# Altium PCB ATRACK_WIFI_V1.PcbDoc
Units mm, origin at the board's own origin, x right, y up, seen from the top; angles counter-clockwise.
Board outline 45 x 67 mm, 2 copper layers (Top Layer, Bottom Layer); 89 components, 58 nets, 258 pads, 71 vias.
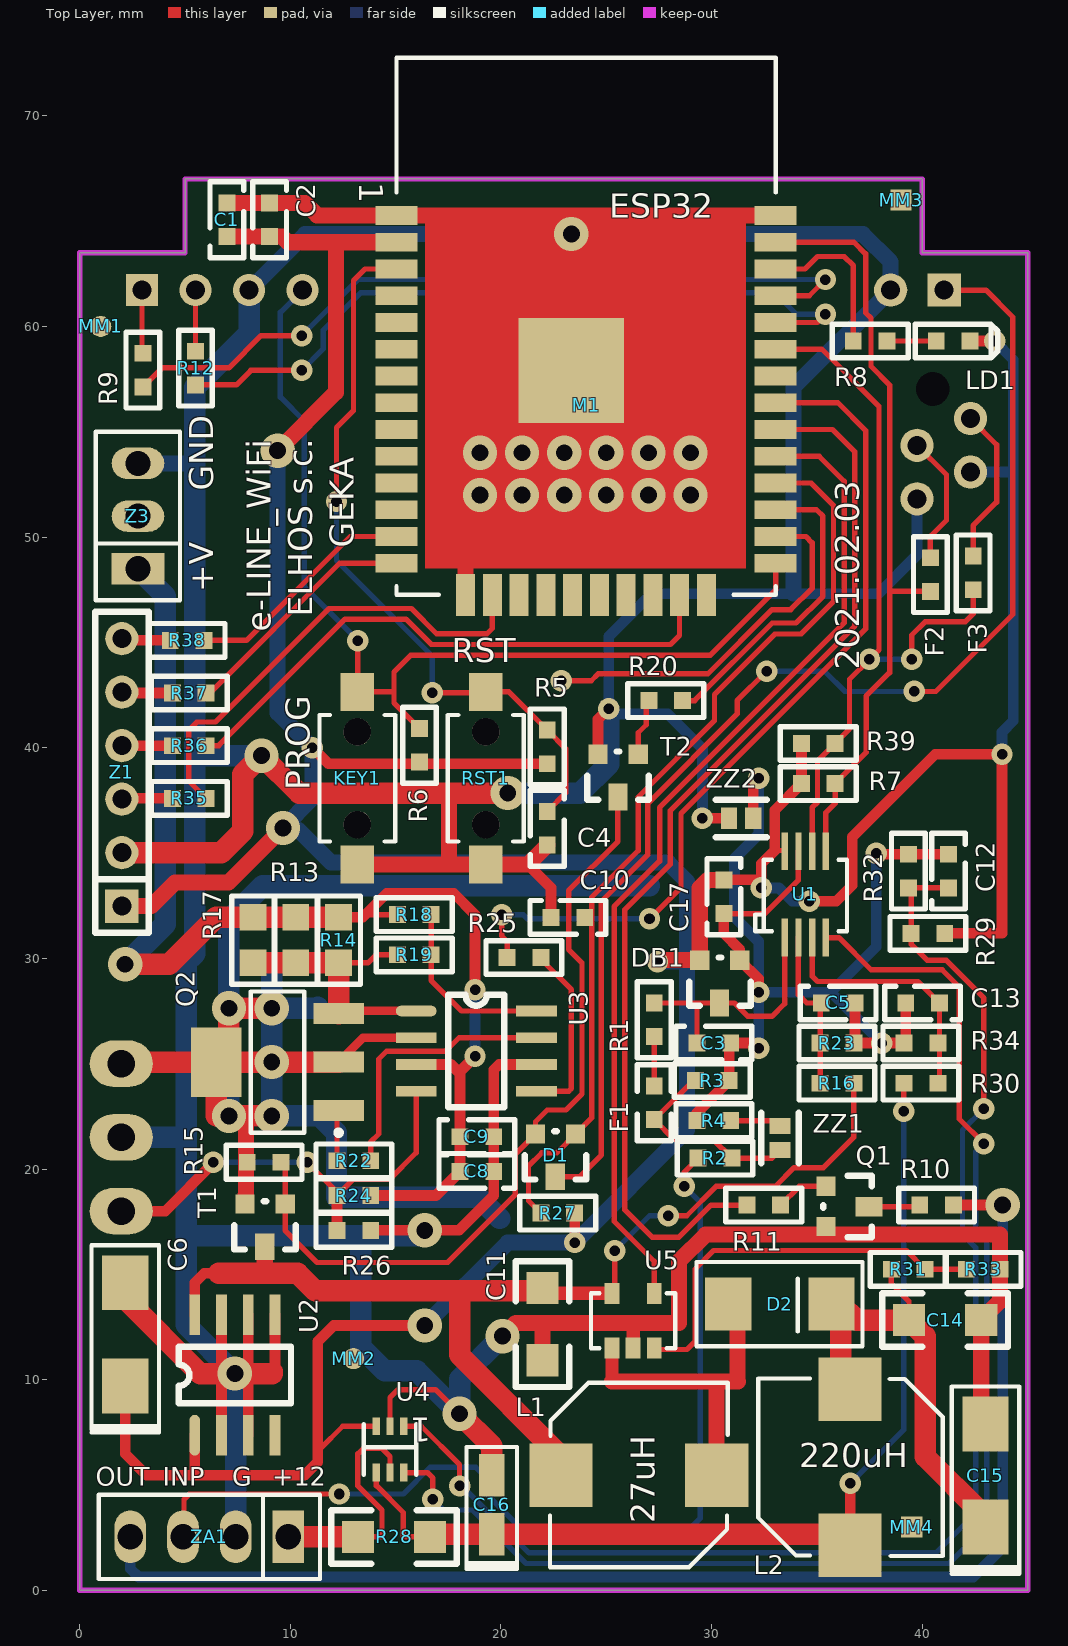
[diagram p0: Top Layer view]
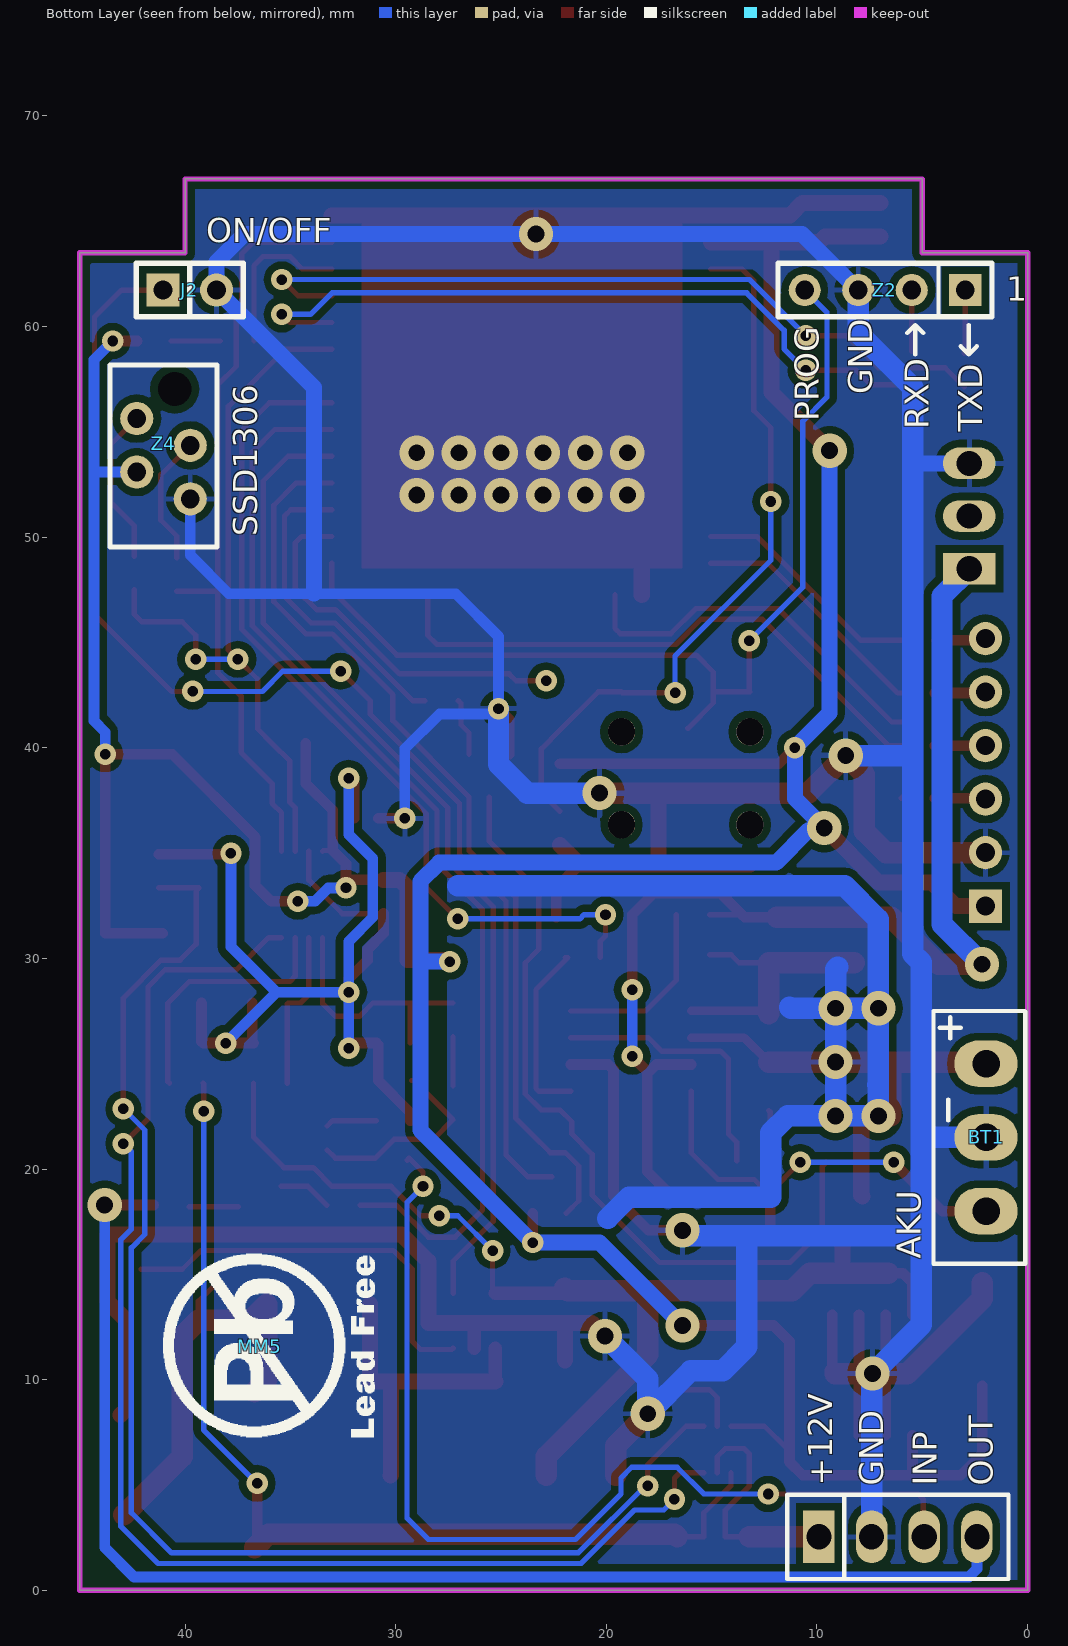
[diagram p1: Bottom Layer view, seen from below]

## Layer stack, top to bottom
Top Layer: signal copper 0.0356
Dielectric: dielectric 0.32, FR-4, Dk 4.8
Bottom Layer: signal copper 0.0356

## Board outline
0,0 0,63.5 5,63.5 5,67 40,67 40,63.5 45,63.5 45,0

## Design rules (kind name [scope] priority, off if disabled: settings)
Clearance Clear_Poly [InPolygon vs not InPolygon] p1: gap=0.356
Clearance Clear_RAD [InNamedPolygon('RAD') vs not InNamedPolygon('RAD')] p2: gap=0.406
Clearance [All] p3: gap=0.203
ComponentClearance [All] p1 off: gap=0.254 collisioncheckmode=3 verticalgap=0.254 showdistances=FALSE
HoleSize [All] p1: absolutevalues=TRUE maxlimit=5 minlimit=0.3 maxpercent=80.000 minpercent=20.000
MinimumSolderMaskSliver [All] p1: minsoldermaskwidth=0.102
PolygonConnect [All] p1: connectstyle=Relief reliefconductorwidth=0.254 reliefentries=4 polygonreliefangle="90 Angle"
RoutingVias [All] p1: holewidth=0.5 width=1.016 viastyle="Through Hole" minholewidth=0.3 minwidth=0.635 maxholewidth=3 maxwidth=5.08
SilkToSilkClearance [All] p1: silktosilkclearance=0.102
SilkscreenOverComponentPads [All] p1: minsilkscreentomaskgap=0.102
SolderMaskExpansion [All] p1: expansion=0.102
Width [All] p1: maxlimit=5.08 minlimit=0.203 preferedwidth=0.254 minimp=50.000000 maximp=50.000000 favimp=50.000000
23 further rules are at their usual default settings.

## Components (designator, comment, footprint, x,y, rotation, side; value= is the part's Value field where it differs from the comment)
BT1 "Battery" BAT4 1.972,18 r270 bottom
C1 "100n" 0603C 6.985,65.962 r90 top
C2 "100n" 0603C 9.017,65.962 r90 top
C3 "100n" 0603C 29.209,25.979 r180 top
C4 "100n" 0603C 22.197,37.077 r90 top
C5 "100n" 0603C 35.102,27.884 r180 top
C6 "100u/6.3V/C" CAP_C 2.159,14.605 r270 top
C8 "1uF" 0603C 17.957,19.883 r180 top
C9 "100n" 0603C 17.957,21.534 r180 top
C10 "100n" 0603C 24.075,31.948 r0 top
C11 "4.7uF" 1206 21.976,14.354 r90 top
C12 "100n" 0603C 41.247,33.245 r270 top
C13 "100n" 0603C 40.915,27.884 r0 top
C14 "4.7uF" 1206 39.367,12.832 r180 top
C15 "100u/16V/C" CAP_C 43,7.9 r270 top
C16 "10u/16V/A" CAP_A 19.558,5.461 r270 top
C17 "100n" 0603C 30.579,33.826 r90 top
D1 "BAT54C" SOT23 22.553,19.451 r270 top
D2 "SK13" RD5 31.187,13.589 r0 top
DB1 "BAS70-04" SOT-23 31.341,29.916 r0 top
F1 "" 0603L 27.277,24.047 r90 top
F2 "BLM18BB141SN1D" 0603R 40.386,49.122 r90 top
F3 "BLM18BB141SN1D" 0603R 42.418,49.198 r90 top
J2 "CON2" SIP2 41.04,61.725 r180 bottom
KEY1 "SW-PB" DTSM31N_2 13.18,38.552 r0 top
L1 "DER0705-27uH" DER0705 26.543,5.461 r0 top
L2 "DER0705-220uH" DER0705 36.576,5.842 r270 top
LD1 "green" 0603D 40.563,59.305 r180 top
M1 "ESP32-WROM32" ESP32-WROM32 15.04,47.258 r0 top locked
MM1 "" REF_CIR 1,60 r0 top
MM2 "" REF_CIR 13,11 r0 top
MM3 "" REF_SQR 39,66 r0 top
MM4 "" REF_SQR 39.5,3 r0 top
MM5 "" PB_FREE_GRAF 36.449,11.557 r90 bottom
Q1 "2N7002" SOT23 37.643,18.186 r0 top
Q2 "FZT788B" MP04A_N1 12.291,22.776 r90 top
R1 "100R" 0603R 27.277,26.184 r270 top
R2 "0R" 0603R 29.26,20.518 r180 top
R3 "270R" 0603R 30.933,24.201 r0 top
R4 "270R" 0603R 31.009,22.296 r0 top
R5 "10k" 0603R 22.197,40.938 r90 top
R6 "10k" 0603R 16.129,41.021 r90 top
R7 "10k" 0603R 35.962,38.298 r0 top
R8 "10k" 0603R 36.626,59.305 r180 top
R9 "33R" 0603R 3,58.825 r90 top
R10 "33R" 0603R 39.778,18.288 r180 top
R11 "1k5" 0603R 31.574,18.288 r180 top
R12 "33R" 0603R 5.5,58.925 r90 top
R13 "1R" 0805R 10.259,31.948 r270 top
R14 "1R" 0805R 12.291,31.948 r270 top
R15 "10k" 0603R 9.652,20.32 r0 top
R16 "4k7" 0603R 35.051,24.074 r180 top
R17 "100M" 0805R 8.227,31.948 r270 top
R18 "0R" 0603R 14.985,32.075 r180 top
R19 "100M" 0603R 14.985,30.17 r180 top
R20 "1k" 0603R 26.923,42.235 r180 top
R22 "1k" 0603R 12.115,20.391 r180 top
R23 "4k7" 0603R 36.851,25.979 r0 top
R24 "10k" 0603R 13.915,18.74 r0 top
R25 "100R" 0603R 21.992,30.043 r0 top
R26 "100M" 0603R 12.115,17.089 r180 top
R27 "1k" 0603R 21.795,17.907 r180 top
R28 "5mR" 1206R 13.208,2.54 r180 top
R29 "10k" 0603R 39.369,31.186 r180 top
R30 "10k" 0603R 40.839,24.074 r0 top
R31 "20k" 0603R 38.432,15.24 r180 top
R32 "2k2" 0603R 39.342,35.045 r90 top
R33 "2k2" 0603R 41.988,15.24 r180 top
R34 "2k2" 0603R 39.039,25.979 r180 top
R35 "100R" 0603R 6.1,37.597 r0 top
R36 "100R" 0603R 6.1,40.097 r0 top
R37 "100R" 0603R 6.1,42.597 r0 top
R38 "100R" 0603R 6,45.097 r0 top
R39 "10k" 0603R 35.962,40.203 r0 top
RST1 "SW-PB" DTSM31N_2 19.276,38.552 r0 top
T1 "IRLML6401" SOT23 8.763,16.129 r270 top
T2 "BC847A" SOT23 25.524,37.485 r270 top
U1 "MAX11612" uMAX8 33.47,30.984 r0 top
U2 "LE33CD" SO8 5.461,7.366 r90 top
U3 "BQ2057" SO8 15.974,27.503 r0 top
U4 "INA199A3" SC70-6 15.382,7.788 r180 top
U5 "LM2703" SOT23-5 25.273,11.497 r0 top
Z1 "JTAG" PIN6 2,32.477 r90 top
Z2 "" PIN4 2.96,61.725 r0 bottom
Z3 "Header 3" PIN3_2.5 2.766,48.498 r90 top
Z4 "WYSW" UMATCH-4 39.751,49.276 r90 bottom locked
ZA1 "ZL-4" PIN4_2.5 9.906,2.54 r180 top
ZZ1 "" ZW1 33.246,22.042 r270 top
ZZ2 "" ZW1 31.976,36.647 r180 top

## Footprints (in the part's own frame and the unit in brackets; to place one, negate y for a bottom-side part, rotate by r counter-clockwise, add the part's x,y. Pads: shape width x height; smd on the part's side, far side on the other; paste and mask are expansions set on the pad)
0603C [mm]
  rect 0.8x0.8 smd: 1(-0.1,0) 2(-1.7,0)
  silkscreen extent -2.7,-0.8 0.9,0.8
0603D [mm]
  rect 0.8x0.8 smd: A(-1.7,0) K(-0.1,0)
  silkscreen extent -3.03,-0.8 0.9,0.8
0603L [mm]
  rect 0.8x0.8 smd: 1(-0.1,0) 2(-1.7,0)
  silkscreen extent -2.7,-0.8 0.9,0.8
0603R [mm]
  rect 0.8x0.8 smd: 1(-0.1,0) 2(-1.7,0)
  silkscreen extent -2.7,-0.8 0.9,0.8
0805R [mil]
  rect 50x50 smd: 1(0,0) 2(85,0)
  silkscreen extent -40,-40 125,41
1206 [mil]
  rect 60x60 smd: 1(-0.13,0.21) 2(-135.13,0.21)
  silkscreen extent -185,-50 50,50
1206R [mil]
  rect 60x60 smd: 1(0,0) 2(-135,0)
  silkscreen extent -185,-50 50,50
BAT4 [mm]
  oval 2.2x3 hole 1.3: 1(0,0) 2(-3.5,0) 3(-7,0)
  silkscreen extent -9.5,-2.5 2.5,1.86
CAP_A [mm]
  rect 2x1.2 smd: 1(0,0) 2(2.8,0)
  silkscreen extent -1.34,-1.2 4.45,1.2
CAP_C [mm]
  rect 2.6x2.2 smd: 1(0,0) 2(4.9,0)
  silkscreen extent -1.78,-1.6 7.11,1.6
DER0705 [mm]
  rect 3x3 smd: 1(-3.7,0) 2(3.7,0)
  silkscreen extent -4.22,-4.37 4.22,4.39
DTSM31N_2 [mm]
  round 1.3 hole 1.3 mask+0: 0(0,-2.2) 0(0,2.2)
  rect 1.6x1.8 smd: 1(0,4.1) 2(0,-4.1)
  silkscreen extent -1.8,-3 1.8,3
ESP32-WROM32 [mm]
  rect 2x0.9 smd: 1(0,18.009) 2(0,16.739) 3(0,15.469) 4(0,14.199) 5(0,12.929) 6(0,11.659) 7(0,10.389) 8(0,9.119) 9(0,7.849) 10(0,6.579) 11(0,5.309) 12(0,4.039) 13(0,2.769) 14(0,1.499) 25(18,1.499) 26(18,2.769) 27(18,4.039) 28(18,5.309) 29(18,6.579) 30(18,7.849) 31(18,9.119) 32(18,10.389) 33(18,11.659) 34(18,12.929) 35(18,14.199) 36(18,15.469) 37(18,16.739) 38(18,18.009)
  rect 0.9x2 smd: 15(3.277,0) 16(4.547,0) 17(5.817,0) 18(7.087,0) 19(8.357,0) 20(9.627,0) 21(10.897,0) 22(12.167,0) 23(13.437,0) 24(14.707,0)
  rect 5x5 smd: 39(8.3,10.65)
  silkscreen extent 0,0 18,25.5
MP04A_N1 [mm]
  rect 1x2.4 smd: 1(0,0) 2(2.3,0) 3(4.6,0)
  rect 3.3x2.4 smd: 4(2.3,5.8)
  silkscreen extent -1.17,-0.12 5.65,4.17
PB_FREE_GRAF [mm]
  silkscreen extent -4.29,-5.46 4.43,4.59
PIN3_2.5 [mm]
  rect 1.5x2.5 hole 1.2: 1(0,0)
  oval 1.5x2.5 hole 1.2: 2(2.5,0) 3(5,0)
  silkscreen extent -1.5,-2 6.5,2
PIN4 [mil]
  rect 60x60 hole 35.43: 1(0,0)
  round 60 hole 35.43: 2(100,0) 3(200,0) 4(300,0)
  silkscreen extent -50,-50 350,50
PIN4_2.5 [mm]
  rect 1.5x2.5 hole 1.2: 1(0,0)
  oval 1.5x2.5 hole 1.2: 2(2.5,0) 3(5,0) 4(7.5,0)
  silkscreen extent -1.5,-2 9,2
PIN6 [mil]
  rect 62x62 hole 35.43: 1(0,0)
  round 62 hole 35.43: 2(100,0) 3(200,0) 4(300,0) 5(400,0) 6(500,0)
  silkscreen extent -50,-50 550,50
RD5 [mm]
  rect 2.2x2.5 smd: A(-0.4,0) K(4.5,0)
  silkscreen extent -1.91,-2 5.97,2
REF_CIR [mm]
  round 1 smd paste-0.5 mask+0.5: 0(0,0)
REF_SQR [mm]
  rect 1x1 smd paste-0.5 mask+0.5: ""(0,0)
SC70-6 [mm]
  rect 0.35x0.85 smd mask+0.152: 1(0,0) 2(0.65,0) 3(1.3,0) 4(1.3,2.2) 5(0.65,2.2) 6(0,2.2)
  silkscreen extent -0.6,-0.1 1.9,2.3
SIP2 [mil]
  rect 62x62 hole 35.43: 1(0,0)
  round 62 hole 35.43: 2(100,0)
  silkscreen extent -50,-50 150,50
SO8 [mil]
  oval 76x20 smd: 1(0,0)
  rect 76x20 smd: 2(0,-50) 3(0,-100) 4(0,-150) 5(225,-150) 6(225,-100) 7(225,-50) 8(225,0)
  silkscreen extent 60,-180 165,30
SOT23 [mil]
  rect 36x36 smd: 1(-87,39) 2(-87,-36)
  rect 50x36 smd: 3(-7,1)
  silkscreen extent -92,-56 -2,59
SOT23-5 [mm]
  rect 0.7x1 smd mask+0.152: 1(0,0) 2(1,0) 3(2,0)
  rect 0.7x1 smd: 4(2,2.6) 5(0,2.6)
  silkscreen extent -1,0 3,2.6
SOT-23 [mil]
  rect 36x36 smd: 1(0,0) 2(-75,0)
  rect 36x50 smd: 3(-38,-80)
  silkscreen extent -95,-85 20,5
UMATCH-4 [mil]
  round 50 hole 62.99: 0(305.12,29.13)
  round 62 hole 35.43: 1(100,0) 2(150,100) 3(200,0) 4(250,100)
  silkscreen extent 10,-50 350,150
uMAX8 [mm]
  rect 0.3x1.8 smd: 1(0,0) 2(0.65,0) 3(1.3,0) 4(1.95,0) 5(1.95,4.1) 6(1.3,4.1) 7(0.65,4.1) 8(0,4.1)
  silkscreen extent -1.4,0.3 2.95,3.7
ZW1 [mil]
  rect 30x40 smd: 1(0,0) 2(45,0)
  silkscreen extent -25,-35 70,35

## Part data
BT1: library part BAT_TEL, "Multicell Battery"
C1 C2 C4 C5 C8 C9 C11 C12 C13 C14 C17: library part CAP
C3 C10: library part CAP, "Capacitor"
C6 C15 C16: library part CAP_TANTAL_SMD, "KONDENSATOR ELEKTROLITYCZNY TANTALOWY SMD"
D2: library part "DIODE SCHOTTKY", "Schottky Diode"
F1 F2 F3: library part KORALIK, "Koralik ferrytowy"
J2: "Connector"
L1 L2: library part CEWKA_1
LD1: library part LED
MM1 MM2 MM3 MM4 MM5: library part MECH
Q1: library part MOSFET-P_1_1
Q2: library part PNP
R1 R2 R3 R4 R5 R6 R7 R8 R9 R10 R11 R12 R13 R14 R15 R16 R17 R18 R19 R20 R22 R23 R24 R25 R26 R27 R29 R30 R31 R32 R33 R34 R35 R36 R37 R38 R39: library part RES3
R28: library part RES1
T1: library part IRLML9303, "Low Charge N-Channel MOSFET"
T2: "NPN Transistor"
U2: library part LE33
U4: library part INA199
Z1: library part Pro1F9.tmp_JTAG_64
Z2 Z4: library part CON4, "Connector"
Z3: "Header, 3-Pin"
ZZ1 ZZ2: library part ZWORA

## Via types
v1: diameter 1.016, hole 0.5, Top Layer to Bottom Layer, tented both sides, 41 vias
v2: diameter 1.626, hole 0.8, Top Layer to Bottom Layer, tented both sides, 17 vias
v3: diameter 1.626, hole 0.8, Top Layer to Bottom Layer, 12 vias
v4: diameter 1.016, hole 0.5, Top Layer to Bottom Layer, 1 vias

## Nets (pads, with @x,y where several pads share a name; then routed paths per layer and width w, separated by ;. In a path a pad name is that pad's centre, name@x,y a point inside that pad or via, vN(x,y) a via of type N, cw(c..) or ccw(c..) an arc to the next point about the centre after c; other vN are vias at no path point)
+12_NAP: C13.1 R30.1 R34.2 U1.3 | length 12.2
  Top Layer w0.254: U1.3 34.77,29.154 35.024,28.9 39.799,28.9 C13.1 40.815,24.15 R30.1
+12_ON: M1.29 U5.4 | length 47.6
  Top Layer w0.254: U5.4 27.273,15.621 25.372,17.522 25.372,32.456 27.531,34.615 27.531,37.155 36.294,45.918 36.294,52.649 35.106,53.837 M1.29
+12_PRAD: U1.4 U4.6 | length 64.5
  Top Layer w0.254: U4.6 16.51,5.588 16.764,5.334 v1(16.764,4.318) ; U1.4 36.04,30.984 37.565,29.459 40.942,29.459 41.755,28.646 41.755,22.38 v1(42.926,21.209)
  Bottom Layer w0.254: v1(16.764,4.318) 17.272,3.81 18.657,3.81 21.197,1.27 41.275,1.27 43.053,3.048 43.053,16.637 42.545,17.145 42.545,20.828 v1(42.926,21.209)
ADC2_IN0: M1.26 | length 17.7
  Top Layer w0.254: v1(22.86,43.18) 24.285,43.18 24.61,43.505 29.817,43.505 32.865,46.553 33.754,46.553 34.77,47.569 34.77,49.728 34.471,50.027 M1.26
AGND: C3.2 C5.2 C12.2 C13.2 C17.2 DB1.1 R3.1 R4.2 R23.1 R32.1 R34.1 U1.7 ZZ2.1 | length 55.6
  Top Layer w0.254: C17.2 32.535,32.126 34.12,33.711 U1.7
  Top Layer w0.508: R4.2 29.309,22.677 R3.1 30.833,25.903 C3.2 31.976,25.979 v1(32.23,25.725) ; C17.2 30.579,31.186 31.341,30.424 DB1.1 32.23,29.027 v1(32.23,28.392) ; ZZ2.1 31.976,38.298 v1(32.23,38.552) ; C5.2 36.802,26.03 R23.1 v1(38.072,25.979) R34.1 39.215,26.055 C13.2 ; v1(37.818,34.996) 37.869,34.945 R32.1 C12.2
  Bottom Layer w0.508: v1(32.23,25.725) v1(32.23,28.392) ; v1(32.23,38.552) 32.23,35.885 31.087,34.742 31.087,31.948 32.23,30.805 v1(32.23,28.392) ; v1(37.818,34.996) 37.818,30.551 35.659,28.392 ; v1(38.072,25.979) 35.659,28.392 ; v1(32.23,28.392) 35.659,28.392
AN1: C3.1 DB1.3 R1.2 U1.1 | length 11.7
  Top Layer w0.254: R1.2 29.309,27.884 ; C3.1 29.309,27.884 ; U1.1 33.47,27.854 32.865,27.249 31.722,27.249 31.087,27.884 DB1.3 29.309,27.884
BAT_MEAS: C5.1 R16.1 R23.2 U1.2 | length 7.7
  Top Layer w0.254: U1.2 34.12,29.423 34.12,28.28 34.516,27.884 35.1,27.884 35.151,27.833 R23.2 R16.1
ENAB: C4.1 M1.3 R5.1 RST1.1 | length 34.9
  Top Layer w0.254: v1(12.192,51.689) 12.192,55.192 13,56 13,62.173 13.554,62.727 M1.3 ; v1(16.736,42.616) 19.24,42.616 RST1.1 20.383,42.652 R5.1 23.086,39.949 23.086,37.866 C4.1
  Bottom Layer w0.254: v1(12.192,51.689) 12.192,48.895 16.736,44.351 v1(16.736,42.616)
GND: BT1.2 C1.1 C2.1 C4.2 C6.1 C8.2 C9.2 C10.2 C11.2 C14.2 C15.1 C16.1 J2.2 KEY1.2 M1.1 M1.15 M1.38 M1.39 Q1.2 R26.2 R33.2 RST1.2 T2.2 U2.2 U2.3 U2.5 U2.6 U2.7 U3.6 U4.2 U5.2 Z1.2 Z2.3 Z3.3 Z4.1 ZA1.2 ZZ2.2 | length 361.5
  Top Layer w0.254: U4.2 14.732,9.144 15.113,9.525 16.891,9.525 v2(18.034,8.382)
  Top Layer w0.508: U2.2 6.731,10.287 U2.7 ; U2.3 8.001,10.287 U2.6 ; 9.271,10.414 U2.5 ; R26.2 v2(16.383,17.089) 18.006,17.089 19.657,18.74 C8.2 C9.2 19.657,24.709 19.911,24.963 U3.6 ; 21.272,34.452 22.375,33.349 C10.2 ; T2.2 24.61,41.346 v1(25.118,41.854) ; v1(29.563,36.647) ZZ2.2
  Top Layer w0.635: U5.2 26.273,12.684 26.289,12.7
  Top Layer w0.762: C1.1 C2.1 10.687,65.862 11.275,65.274 15.033,65.274 M1.1 23.46,65.267 ; 9.144,10.287 9.271,10.414 ; KEY1.2 17.526,34.452 ; 17.653,37.846 17.526,37.719 17.526,34.452 ; M1.15 18.317,49.329 23.34,54.352 M1.39 v2(23.34,64.385) 23.34,65.147 23.46,65.267 ; v2(20.066,12.065) 20.701,12.7 21.971,12.7 ; C11.2 21.971,12.7 ; C4.2 21.272,34.452 RST1.2 17.526,34.452 ; M1.38 23.46,65.267 ; C15.1@43.053,8.329 42.799,8.583 C14.2 43.688,13.716 R33.2 43.688,16.891 29.718,16.891 28.448,15.621 28.448,12.7 26.289,12.7 21.971,12.7
  Top Layer w1.016: Z1.2 6.724,35.017 7.747,36.04 7.747,38.735 v2(8.636,39.624) 10.414,37.846 17.653,37.846 v2(20.32,37.846) ; C6.1 2.159,13.843 5.715,10.287 6.731,10.287 v2(7.366,10.287) 8.001,10.287 9.144,10.287 ; ZA1.2 ZA1.2@7.406,3.008 ; v2(18.034,8.382) 19.558,6.858 C16.1
  Bottom Layer w0.508: v1(29.563,36.647) 29.563,39.949 27.912,41.6 25.372,41.6 v1(25.118,41.854) 25.118,45.283 27.15,47.315 33.881,47.315 37.917,47.315 39.751,49.149 Z4.1
  Bottom Layer w0.762: Z3.3 5.461,53.498 ; Z2.3 10.7,64.385 v2(23.34,64.385) 37.183,64.385 38.5,63.068 J2.2 33.881,57.106 33.881,47.315
  Bottom Layer w1.016: BT1.2 5.018,21.5 5.052,21.534 ; ZA1.2 7.406,10.247 v2(7.366,10.287) 5.052,12.601 5.052,16.835 ; Z2.3 8.04,59.69 5.461,57.111 5.461,53.498 5.461,39.624 ; v2(8.636,39.624) 5.461,39.624 ; v2(16.383,17.089) 16.129,16.835 13.335,16.835 ; v2(20.066,12.065) 18.034,10.033 v2(18.034,8.382) 16.002,10.414 14.478,10.414 13.335,11.557 13.335,16.835 ; v2(20.32,37.846) 23.749,37.846 25.118,39.215 v1(25.118,41.854) ; 5.052,16.835 5.052,21.534 ; 5.052,16.835 13.335,16.835 ; 5.052,21.534 5.052,29.817 5.461,30.226 5.461,39.624
  other v3: 19,52 21,52 23,52 25,52 27,52 29,52 19,54 21,54 23,54 25,54 27,54 29,54
K_POWER: C10.1 D1.1 M1.28 R27.1 | length 44.2
  Top Layer w0.254: R27.1 21.308,18.494 21.308,20.137 21.943,20.772 22.654,20.772 D1.1 24.305,22.423 24.305,32.902 26.515,35.111 26.515,37.663 30.134,41.283 30.134,42.529 33.004,45.398 34.25,45.398 35.786,46.934 35.786,51.506 34.725,52.567 M1.28
LAD_STAT: M1.31 R25.2 | length 41.5
  Top Layer w0.254: v1(20.038,32.075) 20.038,31.059 20.292,30.805 R25.2 ; v1(27.051,31.877) 28.547,33.373 28.547,36.878 37.31,45.641 37.31,55.062 35.995,56.377 M1.31
  Bottom Layer w0.254: v1(20.038,32.075) 21.054,32.075 21.252,31.877 v1(27.051,31.877)
LED1: M1.36 R8.1 | length 7.7
  Top Layer w0.254: M1.36 34.434,62.727 35.024,63.317 36.294,63.317 36.726,62.885 R8.1
NetBT1_1: BT1.1 R24.2 R26.1 U3.4 | length 21.1
  Top Layer w0.254: v1(10.795,20.32) 12.215,18.9 R24.2 12.977,19.502 14.704,19.502 15.974,20.772 U3.4
  Top Layer w0.508: BT1.1 4.058,18 6.35,20.292 v1(6.35,20.32) ; R26.1 R24.2
  Bottom Layer w0.254: v1(6.35,20.32) v1(10.795,20.32)
NetBT1_3: BT1.3 Q2.2 Q2.4 R15.2 T1.2 U3.2 | length 86.2
  Top Layer w0.406: Q2.2 13.448,26.233 U3.2
  Top Layer w0.762: T1.2@7.846,18.689 7.897,18.74 7.897,22.446
  Top Layer w1.016: BT1.3 2.048,25.076 Q2.4 ; 7.897,22.446 v2@7.821,22.522 ; v2(9.116,22.522) v2@7.821,22.522 ; v2(9.116,27.63) v2(7.084,27.63) 7.084,25.104 Q2.4@7.112,25.076 ; Q2.2 v2(9.116,25.076) Q2.4@7.112,25.076 ; Q2.4 6.491,22.522 v2(7.084,22.522) v2@7.821,22.522 ; Q2.4 Q2.4@7.112,25.076
  Bottom Layer w1.016: 7.112,24.003 7.084,24.031 ; 9.017,29.591 9.116,29.492 v2(9.116,27.63) ; 11.303,27.686 11.247,27.63 v2(9.116,27.63) ; 19.939,17.653 18.923,18.669 12.192,18.669 12.192,21.717 11.387,22.522 v2(9.116,22.522) ; 27.051,33.452 8.687,33.452 7.084,31.849 v2(7.084,27.63) ; 7.084,24.031 v2(7.084,27.63) ; 7.084,24.031 v2(7.084,22.522) v2(9.116,22.522) ; v2(7.084,27.63) v2(9.116,27.63) ; v2(9.116,22.522) v2(9.116,25.076) v2(9.116,27.63)
NetC14_1: C14.1 C15.2 D2.K L2.1 R31.1 | length 21.6
  Top Layer w0.254: R31.1 38.532,14.554 39.37,13.716 C14.1 ; C15.2@42.799,3.482 C15.2@42.899,3.583
  Top Layer w1.016: L2.1@36.703,9.415 L2.1 36.123,9.995 36.123,13.589 36.885,12.827 C14.1 40.132,12.065 40.132,6.35 C15.2@42.899,3.583
NetC16_2: C16.2 L2.2 R28.2 R30.2 U4.4 | length 48.2
  Top Layer w0.254: U4.4 14.082,4.968 15.367,3.683 15.367,2.54 R28.2 ; v1(39.116,22.733) 39.116,24.051 R30.2
  Top Layer w0.508: L2.2 v1(36.576,5.08)
  Top Layer w1.016: R28.2 16.758,2.661 C16.2 36.057,2.661 L2.2 L2.2@36.703,2.015
  Bottom Layer w0.254: v1(36.576,5.08) 39.116,7.62 v1(39.116,22.733)
NetD1_2: D1.2 R15.1 T1.1 T2.3 | length 38.2
  Top Layer w0.254: R15.1 9.754,20.118 T1.1 9.754,17.086 11.275,15.565 17.47,15.565 20.673,18.768 20.673,20.696 D1.2 21.638,22.245 22.197,22.804 23.086,22.804 23.848,23.566 23.848,29.789 23.213,30.424 23.213,33.218 25.55,35.555 T2.3
NetD1_3: D1.3 J2.1 | length 60.3
  Top Layer w0.254: D1.3 23.721,19.629 24.762,20.67 24.762,32.712 26.972,34.922 26.972,37.358 31.214,41.6 31.214,42.235 v1(32.611,43.632) ; v1(39.624,42.672) 40.64,42.672 44.295,46.327 44.295,60.448 43.018,61.725 J2.1
  Bottom Layer w0.254: v1(32.611,43.632) 35.362,43.632 36.322,42.672 v1(39.624,42.672)
NetD2_A: D2.A L1.2 U5.1 | length 15.7
  Top Layer w0.635: 25.273,9.906 U5.1
  Top Layer w0.762: 25.273,9.906 30.226,9.906 ; L1.2 30.226,5.478 30.226,9.906 ; D2.A@31.223,13.589 31.223,9.925 31.242,9.906 30.226,9.906
NetF1_1: F1.1 R1.1 | length 2.3
  Top Layer w0.254: F1.1 R1.1
NetF1_2: F1.2 R2.2 R3.2 ZZ1.2 | length 9.6
  Top Layer w0.254: R3.2 29.131,24.201 F1.2 28.217,21.407 30.071,21.407 R2.2 32.865,20.518 ZZ1.2
NetF2_1: F2.1 Z4.3 | length 6.2
  Top Layer w0.254: Z4.3 41.148,52.959 41.148,50.8 40.386,50.038 F2.1
NetF3_1: F3.1 Z4.4 | length 7.5
  Top Layer w0.254: Z4.4 43.533,54.384 43.533,51.661 42.418,50.546 F3.1
NetLD1_K: LD1.K R8.2 | length 2.3
  Top Layer w0.254: R8.2 LD1.K
NetQ1_1: Q1.1 R11.2 | length 2.5
  Top Layer w0.254: R11.2 34.163,19.177 Q1.1
NetQ1_3: Q1.3 R10.1 | length 2.3
  Top Layer w0.254: Q1.3 R10.1@39.802,18.212
NetQ2_1: Q2.1 R22.1 | length 2.4
  Top Layer w0.254: R22.1 12.215,22.7 Q2.1
NetR4_1: R4.1 ZZ1.1 | length 2.4
  Top Layer w0.254: R4.1 32.992,22.296 ZZ1.1
NetR9_1: R9.1 Z2.1 | length 3
  Top Layer w0.254: Z2.1 2.96,58.765 R9.1
NetR12_1: R12.1 Z2.2 | length 2.9
  Top Layer w0.254: R12.1 Z2.2
NetR18_2: R18.2 R19.2 U3.8 | length 8.7
  Top Layer w0.254: R18.2 R19.2 16.685,28.951 18.133,27.503 U3.8
NetR20_1: R20.1 T2.1 | length 2.8
  Top Layer w0.254: T2.1 26.515,40.711 26.896,41.092 26.896,42.108 R20.1
NetR22_2: R22.2 U3.7 | length 12.9
  Top Layer w0.254: R22.2 13.815,21.28 14.196,21.661 14.196,25.217 14.577,25.598 17.371,25.598 18.006,26.233 U3.7
NetR25_1: R25.1 U3.5 | length 8.7
  Top Layer w0.254: U3.5 23.213,23.693 23.34,23.82 23.34,28.519 21.816,30.043 R25.1 R25.1@21.943,30.043
NetR31_2: R31.2 R33.1 U5.3 | length 19.2
  Top Layer w0.254: U5.3 27.34,11.43 28.829,11.43 29.21,11.811 29.21,15.24 30.099,16.129 39.243,16.129 R31.2 R33.1
NetR35_2: R35.2 Z1.3 | length 2.4
  Top Layer w0.508: Z1.3 2.04,37.597 R35.2
NetR36_2: R36.2 Z1.4 | length 2.4
  Top Layer w0.508: Z1.4 R36.2
NetR37_2: R37.2 Z1.5 | length 2.4
  Top Layer w0.508: Z1.5 2.04,42.597 R37.2
NetR38_2: R38.2 Z1.6 | length 2.3
  Top Layer w0.508: Z1.6 2.08,45.097 R38.2
OUT1: R10.2 ZA1.4 | length 62.3
  Top Layer w0.508: R10.2 v2(43.815,18.288)
  Bottom Layer w0.508: ZA1.4 2.406,1.023 2.794,0.635 42.418,0.635 43.815,2.032 v2(43.815,18.288)
POWER: M1.27 R20.2 | length 14.9
  Top Layer w0.254: R20.2 29.194,42.235 32.877,45.918 34.008,45.918 35.278,47.188 35.278,50.998 34.979,51.297 M1.27
PROG: KEY1.1 M1.25 R6.1 Z2.4 | length 46.9
  Top Layer w0.254: KEY1.1 14.922,42.652 ; KEY1.1@13.208,42.68 v1(13.208,45.085) ; R6.1 14.922,42.128 14.922,42.652 ; M1.25 33.04,47.49 29.944,44.394 15.72,44.394 14.922,43.596 14.922,42.652
  Bottom Layer w0.254: Z2.4 9.525,60.67 9.525,56.642 10.668,55.499 10.668,47.625 v1(13.208,45.085)
RXD0: M1.34 R12.2 | length 35.2
  Top Layer w0.254: R12.2 7.441,57.225 8.128,57.912 v1(10.541,57.912) ; M1.34 35.017,60.187 v1(35.405,60.575)
  Bottom Layer w0.254: v1(10.541,57.912) 11.557,58.928 11.557,59.817 13.335,61.595 33.02,61.595 34.04,60.575 v1(35.405,60.575)
SCL: F2.2 M1.37 R7.1 U1.5 | length 36.4
  Top Layer w0.254: M1.37 36.757,63.997 37.31,63.444 37.31,60.65 37.564,60.396 37.564,58.11 38.453,57.221 38.453,43.561 37.338,42.446 37.338,39.774 R7.1 35.862,37.358 35.42,36.916 U1.5 ; 38.529,47.422 F2.2
SDA: F3.2 M1.33 R39.1 U1.6 | length 36.1
  Top Layer w0.254: M1.33 35.233,58.917 37.945,56.205 37.945,44.648 v1(37.493,44.196) 36.548,43.251 36.548,40.889 R39.1 35.024,39.365 35.024,37.409 34.77,37.155 U1.6 ; v1(39.497,44.196) 39.497,45.339 40.132,45.974 42.037,45.974 42.418,46.355 F3.2
  Bottom Layer w0.254: v1(37.493,44.196) v1(39.497,44.196)
STER1: M1.30 R11.1 | length 51.7
  Top Layer w0.254: R11.1 29.972,18.288 28.448,16.764 27.178,16.764 25.88,18.062 25.88,32.317 28.039,34.476 28.039,37.016 36.802,45.779 36.802,54.046 35.741,55.107 M1.30
TCK: M1.16 R35.1 | length 22.6
  Top Layer w0.254: R35.1 5.179,38.418 5.179,40.838 5.56,41.219 6.449,41.219 11.839,46.609 15.748,46.609 16.947,45.41 19.333,45.41 19.587,45.664 M1.16
TDI: M1.14 R37.1 | length 11.6
  Top Layer w0.254: R37.1 6.176,42.597 12.336,48.757 M1.14
TDO: M1.23 R36.1 | length 27.6
  Top Layer w0.254: R36.1 6.597,40.097 12.601,46.101 15.494,46.101 16.693,44.902 28.044,44.902 28.477,45.335 M1.23
TMS: M1.13 R38.1 | length 11.2
  Top Layer w0.254: R38.1 7.914,45.097 12.844,50.027 M1.13
TXD0: M1.35 R9.2 | length 37.2
  Top Layer w0.254: R9.2 3.91,58.035 7.084,58.035 8.612,59.563 v1(10.541,59.563) ; M1.35 34.636,61.457 v1(35.405,62.226)
  Bottom Layer w0.254: v1(10.541,59.563) 13.204,62.226 v1(35.405,62.226)
V12: R28.1 U4.5 ZA1.1 | length 11.4
  Top Layer w0.254: R28.1 14.351,2.54 14.351,3.81 13.208,4.953 13.208,6.477 13.462,6.731 14.351,6.731 14.732,6.35 U4.5
  Top Layer w1.016: ZA1.1 R28.1
VA1: R2.1 ZA1.3 | length 47.1
  Top Layer w0.254: ZA1.3 4.953,2.587 4.953,4.318 5.207,4.572 v4(12.319,4.572) ; v1(28.702,19.177) 28.702,19.86 R2.1 R2.1@29.464,20.414
  Bottom Layer w0.254: v4(12.319,4.572) 15.367,4.572 16.637,5.842 18.796,5.842 19.304,5.334 19.304,4.572 21.463,2.413 28.448,2.413 29.464,3.429 29.464,18.415 v1(28.702,19.177)
VBAT1: C11.1 L1.1 R16.2 T1.3 U2.8 U5.5 | length 52.3
  Top Layer w0.254: U5.5 25.4,14.224 v1(25.4,16.129) ; v1(27.94,17.78) 28.817,17.78 30.214,19.177 33.02,19.177 33.909,20.066 35.306,20.066 36.751,21.511 R16.2
  Top Layer w0.508: U2.8 5.461,14.605 5.913,15.057 6.604,15.057 ; T1.3@8.786,16.304 T1.3
  Top Layer w0.635: C11.1@21.844,14.224 21.971,14.097 U5.5
  Top Layer w0.762: 8.786,15.057 T1.3@8.786,16.304
  Top Layer w1.016: 6.604,15.057 8.786,15.057 10.343,15.057 11.176,14.224 18.034,14.224 ; C11.1 21.844,14.224 18.034,14.224 ; L1.1 22.843,6.367 18.034,11.176 18.034,14.224
  Bottom Layer w0.254: v1(25.4,16.129) 27.051,17.78 v1(27.94,17.78)
VC3: C1.2 C2.2 C6.2 C17.1 DB1.2 LD1.A M1.2 R5.2 R6.2 R7.2 R27.2 R29.2 R39.2 U1.8 U2.1 U4.3 Z1.1 Z4.2 | length 206
  Top Layer w0.254: 11.303,6.731 11.43,6.731 12.487,7.788 U4.3 ; 32.992,35.123 33.431,35.123 U1.8
  Top Layer w0.508: C6.2 2.159,6.477 3.175,5.461 5.461,5.461 ; U2.1 5.461,5.461 ; v1(11.049,40.005) 11.816,39.238 R5.2 ; v2(16.383,12.573) 12.065,12.573 11.303,11.811 11.303,6.731 11.303,6.096 10.668,5.461 5.461,5.461 ; v1(23.495,16.51) R27.2 ; C17.1 32.23,33.726 v1@32.357,33.599 ; v1(32.357,33.345) v1@32.357,33.599 ; R39.2 R7.2 32.992,37.028 32.992,35.123 32.357,34.488 v1@32.357,33.599 ; v1(34.643,32.71) 35.913,32.71 36.675,33.472 36.675,35.758 40.612,39.695 v1(43.787,39.695) 43.787,31.186 R29.2 ; LD1.A v1@43.43,59.305
  Top Layer w0.762: Z1.1 3.401,32.477 4.523,33.599 7.056,33.599 v2(9.652,36.195) ; C1.2 C2.2 9.62,64.262 9.885,63.997 12.164,63.997 ; v2(9.398,54.102) 12.164,56.868 12.164,63.997 ; M1.2 12.164,63.997 ; v1(27.432,29.845) 27.503,29.916 DB1.2 29.436,33.345 29.817,33.726 C17.1
  Bottom Layer w0.508: v1(32.357,33.345) 33.195,33.345 33.83,32.71 v1(34.643,32.71) ; Z4.2 44.323,53.086 ; v1(43.434,59.309) 44.323,58.42 44.323,53.086 ; v1(43.787,39.695) 43.787,40.739 44.323,41.275 44.323,53.086
  Bottom Layer w0.762: v2(9.398,54.102) 9.398,41.656 v1(11.049,40.005) 11.049,37.592 v2(9.652,36.195) ; v2@10.386,36.096 11.938,34.544 27.94,34.544 28.829,33.655 28.829,29.845 ; v2(16.383,12.573) 20.32,16.51 v1(23.495,16.51) 28.829,21.844 28.829,29.845 ; v1(27.432,29.845) 28.829,29.845
VC_REF: C12.1 R29.1 R32.2 U4.1 | length 65.5
  Top Layer w0.254: U4.1 16.215,7.788 18.034,5.969 v1(18.034,4.953) ; C12.1 R32.2 39.469,33.218 R29.1 39.469,30.678 40.231,29.916 41.132,29.916 42.926,28.122 v1(42.926,22.86)
  Bottom Layer w0.254: v1(18.034,4.953) 18.034,5.08 21.336,1.778 40.64,1.778 42.545,3.683 42.545,16.256 41.91,16.891 41.91,21.844 v1(42.926,22.86)
VIN: C8.1 C9.1 R13.1 R14.1 R17.1 R18.1 R24.1 U3.3 Z3.1 | length 59.1
  Top Layer w0.254: 13.561,32.075 R18.1
  Top Layer w0.508: R14.1 13.434,31.948 13.561,32.075 14.577,33.091 17.752,33.091 18.768,32.075 v1(18.768,28.519) ; R24.1 16.914,18.74 C8.1 C9.1 18.057,24.531 ; U3.3 17.625,24.963 18.057,24.531 ; v1(18.768,25.344) 18.057,24.633 18.057,24.531
  Top Layer w1.016: v2(2.159,29.718) 4.247,29.718 6.477,31.948 R17.1 R13.1 R14.1@11.91,31.948
  Bottom Layer w0.508: v1(18.768,25.344) v1(18.768,28.519)
  Bottom Layer w1.016: v2(2.159,29.718) 4.064,31.623 4.064,47.2 Z3.1
VSNS: Q2.3 R13.2 R14.2 R17.2 R19.1 U3.1 | length 13.2
  Top Layer w0.254: R14.2 13.688,29.789 14.069,30.17 R19.1
  Top Layer w0.406: Q2.3 12.418,27.503 U3.1
  Top Layer w1.016: R17.2 R13.2 R14.2 Q2.3
pads on no net: KEY1.0 M1.4 M1.5 M1.6 M1.7 M1.8 M1.9 M1.10 M1.11 M1.12 M1.17 M1.18 M1.19 M1.20 M1.21 M1.22 M1.24 M1.32 MM1.0 MM2.0 MM3. MM4. RST1.0 U2.4 Z3.2 Z4.0

## Polygon pours and split planes (outlines as drawn)
NetBT1_3 on Bottom Layer "A_RAD" (solid, remove dead copper, pour order 5): 5.052,19.685 5.179,19.558 5.052,16.835 11.303,16.891 27.559,16.891 27.559,34.544 5.08,34.544
GND on Bottom Layer "RAD" (solid, remove dead copper, pour order 4): 0,67 45.014,67 45.085,66.929 45,66.844 45,0 0,0

## Keep-outs
Keep-Out Layer:
  the board outline again, w0.254

## Other copper
Top Layer:
  rectangle net GND: 16.383,48.514 31.623,65.267

## Silkscreen, mask and mechanical layers (free items; w line width, h text height)
Top Overlay:
  text "ESP32" at 25.146,65.151 h1.14
  text "GND" at 6.35,52.197 h1.14 r90
  text "GEKA" at 13,49.5 h1.14 r90
  text "+V" at 6.35,47.371 h1.14 r90
  text "ELHOS s.c." at 11.049,46.228 h1.14 r90
  text "e-LINE_WiFi" at 9.079,45.5 h1.14 r90
  text "RST" at 17.653,44.069 h1.14
  text "2021.02.03" at 37,43.703 h1.14 r90
  text "PROG" at 10.922,37.973 h1.14 r90
  text "220uH" at 34.163,5.842 h1.14
  text "OUT" at 0.762,4.953 h0.89
  text "INP" at 3.937,4.953 h0.89
  text "G" at 7.239,4.953 h0.89
  text "+12" at 9.144,4.953 h0.89
  text "27uH" at 27.305,3.175 h1.14 r90
Bottom Overlay:
  lines w0.2: 2.413,59.055 2.794,58.674 ; 2.794,60.071 2.794,58.674 ; 3.175,59.055 2.794,58.674 ; 4.953,59.69 5.334,60.071 ; 5.334,58.674 5.334,60.071 ; 5.715,59.69 5.334,60.071 ; 8.706,0.54 8.706,4.54 ; 0.906,0.54 11.406,0.54 11.406,4.54 0.906,4.54 0.906,0.54
  text "ON/OFF" at 38.989,64.008 h1.14
  text "1" at 1.016,61.214 h1.14
  text "GND" at 7.366,56.769 h1.14 r270
  text "PROG" at 9.906,55.499 h1.14 r270
  text "RXD" at 4.699,55.118 h1.14 r270
  text "TXD" at 2.159,54.991 h1.14 r270
  text "SSD1306" at 36.576,50.038 h1.14 r270
  text "AKU" at 5.08,15.748 h1.14 r270
  text "OUT" at 1.651,4.953 h1.14 r270
  text "INP" at 4.318,4.953 h1.14 r270
  text "GND" at 6.858,4.953 h1.14 r270
  text "+12V" at 9.271,4.953 h1.14 r270
Mechanical 1:
  the board outline again, w0.254

## Text inside footprints (layer, text, board x,y; h text height)
M1: Top Overlay "1" at 13.265,66.833 h1.14 r270
U4: Top Overlay "1" at 16.682,8.188 h1.14 r180